# EAGLE board bootloader1 (EAGLE 9.6.2)
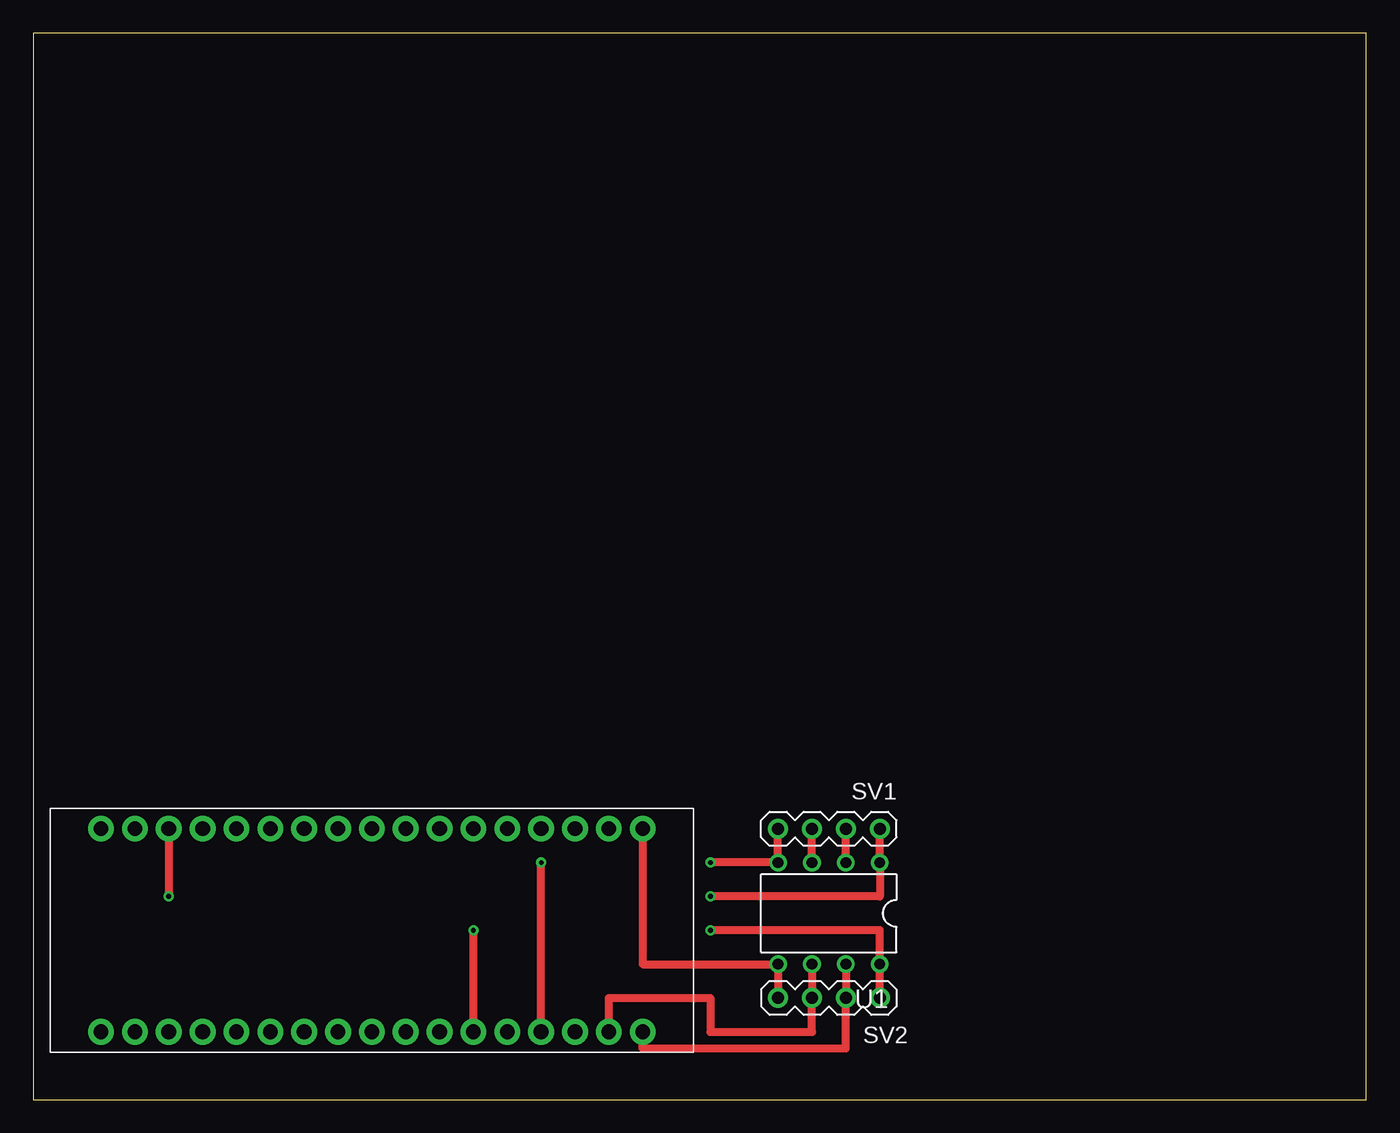
[diagram p0: board, top side]
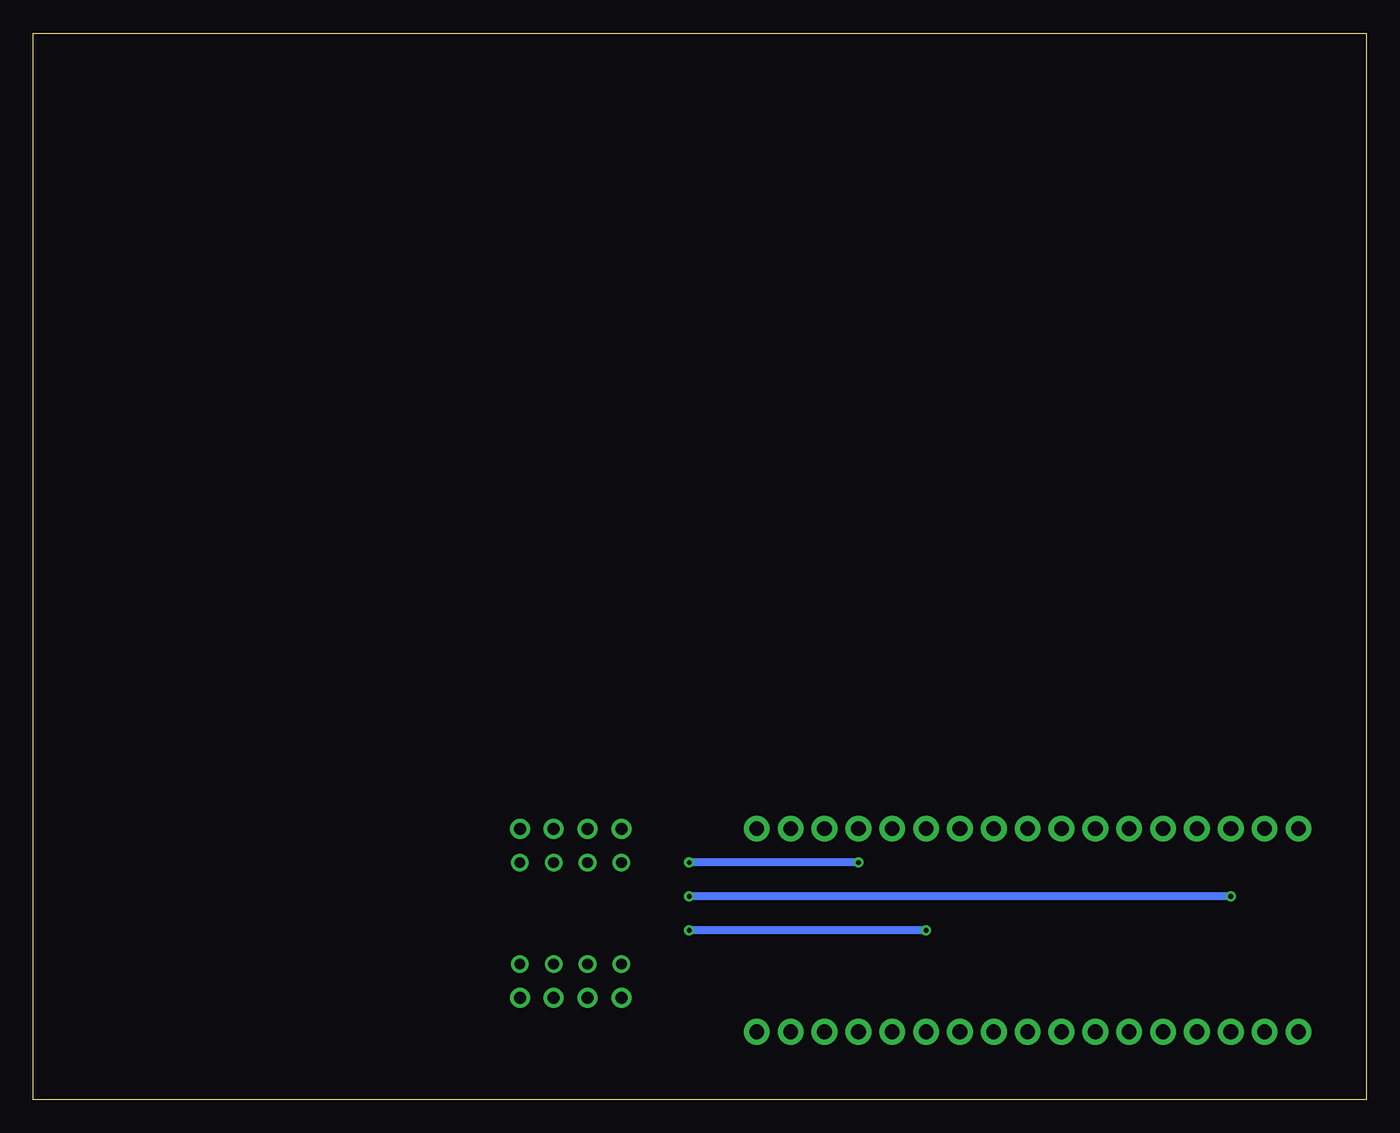
[diagram p1: board, bottom side, seen from below]

Size 100 x 80 mm. Coordinates in mm from the lower left corner, seen from the top.
Outline: 0,0 100,0 100,80 0,80 0,0
Copper layers (1*16): Top 0.035mm / dielectric 1.5mm / Bottom 0.035mm
Design rules "default": minimum track width 6mil, minimum drill 0.35mm, track to track 6mil, track to pad 6mil, pad to pad 6mil, via to via 6mil, smd to smd 6mil, copper to edge 40mil, drill to drill 6mil, minimum pad ring 10mil, minimum via ring 8mil, stop-mask expansion 4mil, vias tented up to drill 0mil, thermal gap 10mil

## Footprints (pad centres in the part's own frame; a part is rotated, then mirrored left to right if it is on the bottom)
PINHEAD-MA04-1 = drill 0.9 pad 1.5: 1 -3.81,0; 2 -1.27,0; 3 1.27,0; 4 3.81,0
PDIP08_300MIL = drill 0.813: 1 -3.81,-3.81; 2 -1.27,-3.81; 3 1.27,-3.81; 4 3.81,-3.81; 5 3.81,3.81; 6 1.27,3.81; 7 -1.27,3.81; 8 -3.81,3.81
ARDUINOMICRO = drill 1.1 pad 1.93: P$1 -20.32,7.62; P$2 -17.78,7.62; P$3 -15.24,7.62; P$4 -12.7,7.62; P$5 -10.16,7.62; P$6 -7.62,7.62; P$7 -5.08,7.62; P$8 -2.54,7.62; P$9 0,7.62; P$10 2.54,7.62; P$11 5.08,7.62; P$12 12.7,-7.62; P$13 10.16,-7.62; P$14 12.7,7.62; P$15 15.24,7.62; P$16 17.78,7.62; P$17 20.32,7.62; P$18 20.32,-7.62; P$19 17.78,-7.62; P$20 15.24,-7.62; P$21 7.62,7.62; P$22 10.16,7.62; P$23 7.62,-7.62; P$24 5.08,-7.62; P$25 2.54,-7.62; P$26 0,-7.62; P$27 -2.54,-7.62; P$28 -5.08,-7.62; P$29 -7.62,-7.62; P$30 -10.16,-7.62; P$31 -12.7,-7.62; P$32 -15.24,-7.62; P$33 -17.78,-7.62; P$34 -20.32,-7.62

## Placement (x,y rotation side)
SV1  [PINHEAD-MA04-1]  59.69,20.32 180 top
SV2  [PINHEAD-MA04-1]  59.69,7.62 0 top
U1  ATTINY85-20P  [PDIP08_300MIL]  59.69,13.97 180 top
U$1  ARDUINOMICRO  [ARDUINOMICRO]  25.4,12.7 0 top

## Library data of the parts
SV1 SV2 = ytani1; OC_FARNELL: unknown; OC_NEWARK: unknown
U1 = _hhn_attiny25_45_85
U$1 = adafruit

## Nets
+5V: SV2.4 U1.8 U$1.P$23
GND: SV1.4 U1.4 U$1.P$12
N$3: SV1.1 U1.1 U$1.P$3
N$4: SV2.3 U1.7 U$1.P$18
N$5: SV2.2 U1.6 U$1.P$19
N$6: SV2.1 U1.5 U$1.P$17
N$8: SV1.3 U1.3
N$9: SV1.2 U1.2

## Tracks (layer width: path | path; a pad name or v marks a point on that pad's centre or on a via)
+5V  (via drill 0.35)
  Top 0.61: v50.8,12.7 63.5,12.7 U1.8 SV2.4 | U$1.P$23 v33.02,12.7
  Bottom 0.61: v33.02,12.7 v50.8,12.7
GND  (via drill 0.35)
  Top 0.61: U$1.P$12 v38.1,17.78 | v50.8,17.78 U1.4 SV1.4
  Bottom 0.61: v38.1,17.78 v50.8,17.78
N$3  (via drill 0.35)
  Top 0.61: v50.8,15.24 63.5,15.24 U1.1 SV1.1 | U$1.P$3 v10.16,15.24
  Bottom 0.61: v10.16,15.24 v50.8,15.24
N$4
  Top 0.61: U1.7 SV2.3 60.96,3.81 45.72,3.81 U$1.P$18
N$5
  Top 0.61: U1.6 SV2.2 58.42,5.08 50.8,5.08 50.8,7.62 43.18,7.62 U$1.P$19
N$6
  Top 0.61: U$1.P$17 45.72,10.16 U1.5 SV2.1
N$8
  Top 0.61: U1.3 SV1.3
N$9
  Top 0.61: U1.2 SV1.2